# Altium PCB Modelo-2.PcbDoc
Units mm, origin at the board's own origin, x right, y up, seen from the top; angles counter-clockwise.
Board outline 72.5 x 45 mm, 2 copper layers (Top Layer, Bottom Layer); 12 components, 8 nets, 35 pads, 0 vias.
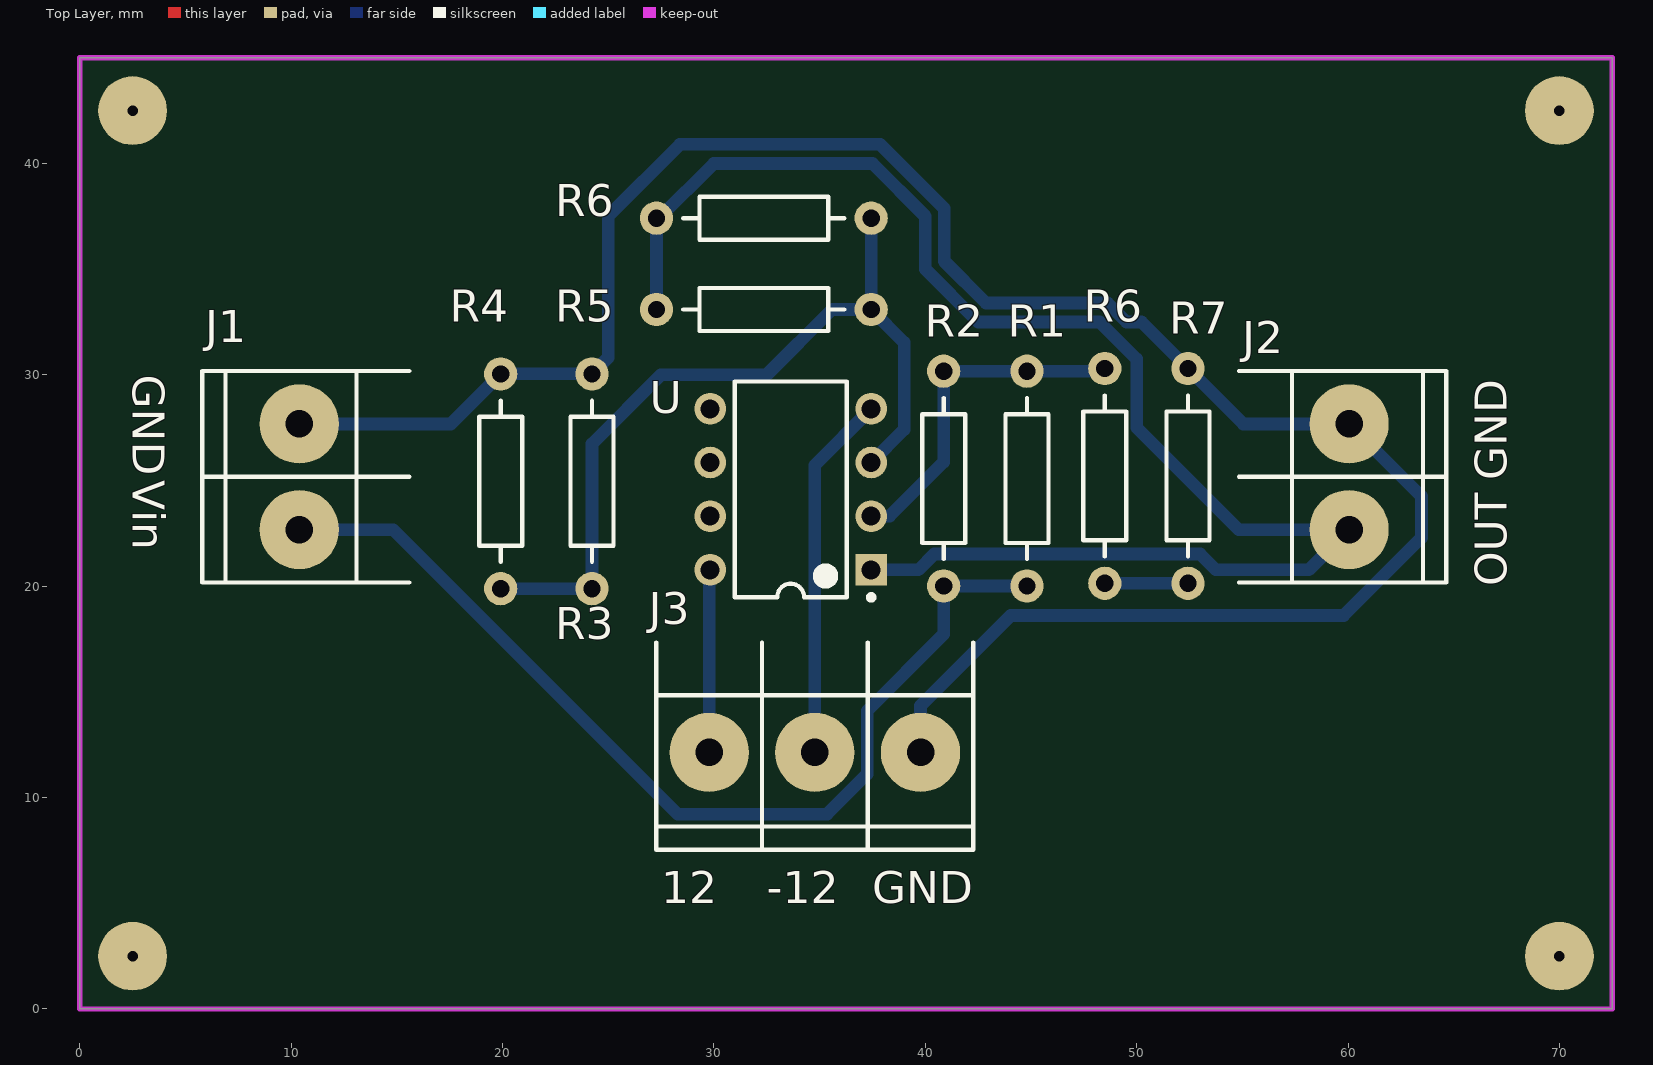
[diagram p0: Top Layer view]
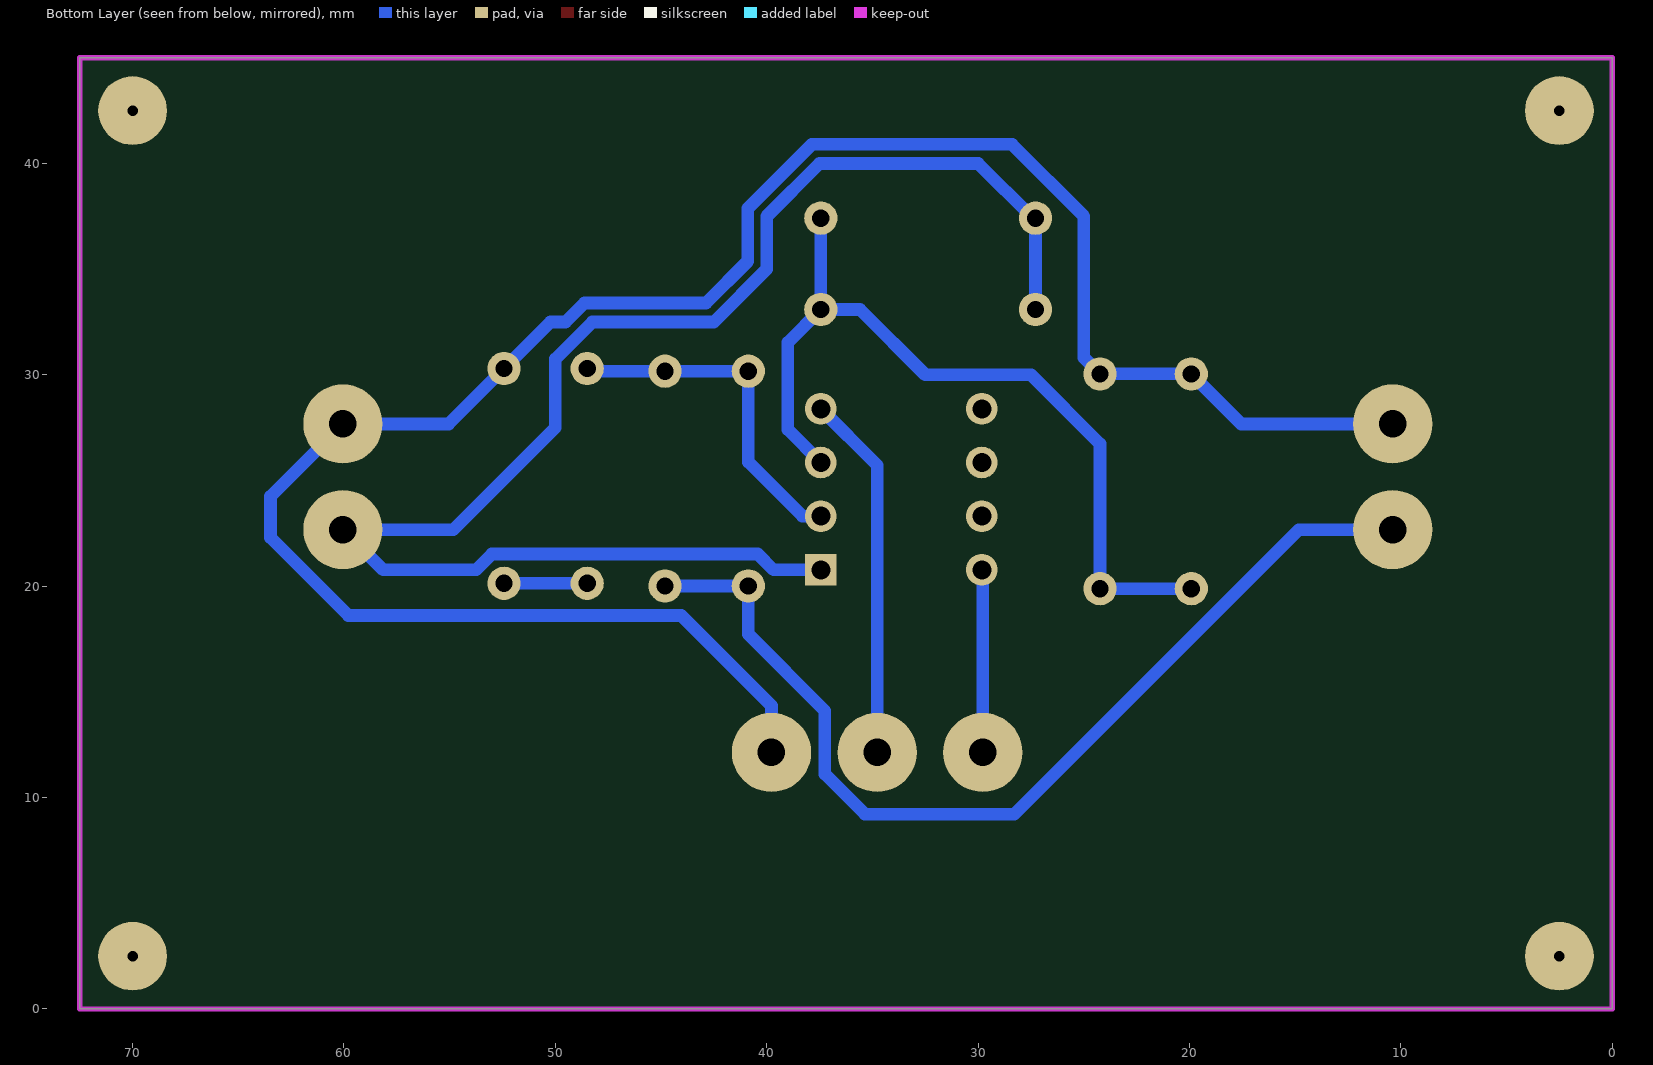
[diagram p1: Bottom Layer view, seen from below]
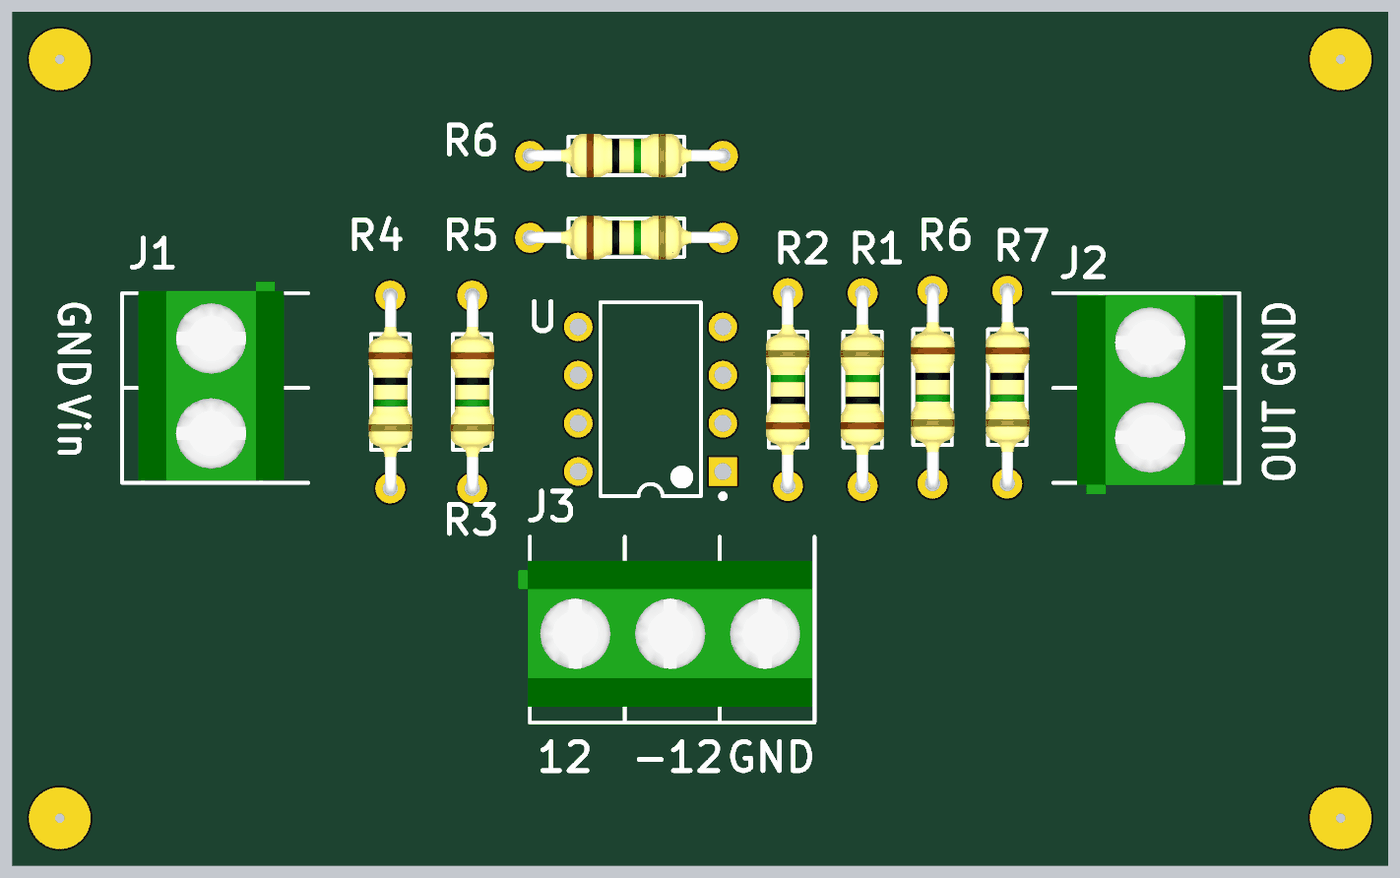
[diagram p2: 3D render of the assembled board from above, using the file's embedded part models]

## Layer stack, top to bottom
Top Solder: solder mask 0.0102, Solder Resist, Dk 3.5
Top Layer: signal copper 0.0356
Dielectric 1: dielectric 0.32, FR-4, Dk 4.8
Bottom Layer: signal copper 0.0356
Bottom Solder: solder mask 0.0102, Solder Resist, Dk 3.5

## Board outline
0,0 0,45 72.5,45 72.5,0

## Design rules (kind name [scope] priority, off if disabled: settings)
Clearance [All] p1: gap=0.3 ignorepadtopadclearanceinfootprint=FALSE
PolygonConnect [All] p1: connectstyle=Relief reliefconductorwidth=0.254 reliefentries=4 polygonreliefangle="90 Angle" airgapwidth=0.254
RoutingVias [All] p1: holewidth=0.7 width=2 viastyle="Through Hole" minholewidth=0.7 minwidth=2 maxholewidth=0.7 maxwidth=2
SolderMaskExpansion [All] p1: expansion=0.102
Width [All] p1: maxlimit=0.6 minlimit=0.6 preferedwidth=0.6
30 further rules are at their usual default settings.

## Components (designator, comment, footprint, x,y, rotation, side; value= is the part's Value field where it differs from the comment)
J1 "BORNERA 2" BORNERA2 10.391,25.177 r0 top
J2 "BORNERA 2" BORNERA2 60.048,25.177 r180 top
J3 "BORNERA 3" BORNERA3 34.775,12.136 r90 top
R1 "150K" RES400 44.808,20.01 r90 top
R2 "150K" RES400 40.871,20.01 r90 top
R3 "150K" RES400 24.234,30.043 r270 top
R4 "150K" RES400 19.916,30.043 r270 top
R5 "150K" RES400 27.282,33.091 r0 top
R6 "150K" RES400 48.491,30.297 r270 top
R6 "150K" RES400 27.282,37.409 r0 top
R7 "150K" RES400 52.428,30.297 r270 top
U "TL072CP" TI-P8 33.632,24.582 r180 top

## Footprints (in the part's own frame and the unit in brackets; to place one, negate y for a bottom-side part, rotate by r counter-clockwise, add the part's x,y. Pads: shape width x height; smd on the part's side, far side on the other; paste and mask are expansions set on the pad)
BORNERA2 [mm] "Bornera con Tornillos 5mm separación"
  round 3.75 hole 1.3: 1(0,2.5) 2(0,-2.5)
  silkscreen extent -4.6,-5 5.2,5, body extent -3.76,-4.89 3.94,5.61, height 10
BORNERA3 [mm] "Bornera con Tornillos 5mm separación"
  round 3.75 hole 1.3: 1(0,5) 2(0,0) 3(0,-5)
  silkscreen extent -4.6,-7.5 5.2,7.5, body extent -3.76,-7.39 3.94,8.11, height 10.05
RES400 [mil]
  round 62 hole 32: 1(0,0) 2(400,0)
  silkscreen extent 50,-40 350,40, body extent -12,-45 412,46, height 96
TI-P8 [mm] "DIP, 8-Leads, Body 9.59x6.35mm, Pitch 2.54mm"
  rect 1.5x1.5 hole 0.9: 1(-3.81,3.81)
  round 1.5 hole 0.9: 2(-3.81,1.27) 3(-3.81,-1.27) 4(-3.81,-3.81) 5(3.81,-3.81) 6(3.81,-1.27) 7(3.81,1.27) 8(3.81,3.81)
  silkscreen extent -3.94,-5.1 2.65,5.23, body extent -3.95,-5.07 3.95,5.07, height 5.08

## Part data
R1 R2 R3 R4 R5 R6 R6 R7: library part RES
U: "Dual Low-Noise JFET-Input General-Purpose Operational Amplifier, 7 to 36 V, 0 to 70 degC, 8-pin DIP (P8), Pb-Free (RoHS)", Manufacturer="Texas Instruments", Rating=Catalog, Supplier Part Number 1=296-1775-5-ND, Total Supply Voltage(Max)(+5V is 5, +/-5V is 10)=36, Total Supply Voltage(Min)(+5V is 5, +/-5V is 10)=7, CMRR(Min)(dB)=70, Code_JEDEC=MS-001, ComponentLink1Description="Manufacturer URL", ComponentLink1URL=http://www.ti.com/, ComponentLink2Description=Datasheet, ComponentLink2URL=http://www.ti.com/lit/ds/symlink/tl072.pdf, ComponentLink3Description="Package Specification", ComponentLink3URL=http://www.ti.com/litv/pdf/mpdi001b, DatasheetVersion=SLOS080J, Eco-Plan="Pb-Free (RoHS)", GBW(Typ)(MHz)=3, IIB(Max)(pA)=200, Iq per channel(Max)(mA)=2.5, Mounting Technology="Through Hole", Number of Channels=2, Offset Drift(Typ)(uV/C)=18, PackageDescription="8-Pin Plastic In-Line, Body 9.59 x 6.35 mm, Pitch 2.54 mm", PackageReference=P8, PackageVersion="4040082/E, 04/2010", PartNumber=TL072CP, Slew Rate(Typ)(V/us)=13, Sub Family="General Purpose Amplifier, High Supply Voltage Amplifier (>=30V)", Supplier 1=Digi-Key, Supplier 2=Farnell, Supplier 3=Newark, Supplier 4=Mouser, Supplier Part Number 2=1106015, Supplier Part Number 3=60K6988, Supplier Part Number 4=595-TL072CP, Vio (25C)(Max)(mV)=10, Vn at 1kHz(Typ)(nV/rtHz)=18

## Free pads (board coordinates)
  round 3.25 hole 0.5: 2(2.5,42.5) 3(70,42.5) 4(70,2.5) 5(2.5,2.5)

## Nets (pads, with @x,y where several pads share a name; then routed paths per layer and width w, separated by ;. In a path a pad name is that pad's centre, name@x,y a point inside that pad or via, vN(x,y) a via of type N, cw(c..) or ccw(c..) an arc to the next point about the centre after c; other vN are vias at no path point)
-VCC: J3.2 U.4 | length 17.4
  Bottom Layer w0.6: J3.2 34.775,25.725 U.4
GND: J1.1 J2.2 J3.3 R3.1 R4.1 R7.1 | length 102
  Bottom Layer w0.6: J1.1 17.55,27.677 R4.1 R3.1 25,30.809 25,37.5 28.4,40.9 37.873,40.9 40.9,37.873 40.9,35.373 42.873,33.4 48.623,33.4 49.523,32.5 50.225,32.5 R7.1 55.048,27.677 J2.2 63.477,24.248 63.477,22.296 59.794,18.613 44.046,18.613 39.775,14.342 J3.3
NetJ1_2: J1.2 R1.1 R2.1 | length 47.6
  Bottom Layer w0.6: J1.2 14.823,22.677 28.285,9.215 35.354,9.215 37.25,11.111 37.25,14.103 40.871,17.724 R2.1 R1.1
NetJ2_1: J2.1 R5.1 R6.1@27.282,37.409 U.1 | length 72.7
  Bottom Layer w0.6: R5.1 27.282,37.409 27.409,37.409 30,40 37.5,40 40,37.5 40,35 42.5,32.5 48.25,32.5 50,30.75 50,27.5 54.823,22.677 J2.1 58.143,20.772 53.755,20.772 53.003,21.524 40.423,21.524 39.671,20.772 U.1
NetR1_2: R1.2 R2.2 R6.1@48.491,30.297 U.2 | length 16.5
  Bottom Layer w0.6: U.2 38.312,23.312 40.871,25.871 R2.2 R1.2 48.364,30.17 R6.1@48.491,30.297
NetR3_2: R3.2 R4.2 R5.2 R6.2@37.442,37.409 U.3 | length 39.9
  Bottom Layer w0.6: R4.2 R3.2 24.234,26.734 27.5,30 32.5,30 35.591,33.091 R5.2 ; U.3 39,27.41 39,31.533 R5.2 ; R6.2@37.442,37.409 R5.2
NetR6_2: R6.2@48.491,20.137 R7.2 | length 3.9
  Bottom Layer w0.6: R6.2@48.491,20.137 R7.2
VCC: J3.1 U.8 | length 8.7
  Bottom Layer w0.6: J3.1 29.775,20.725 U.8
pads on no net: U.5 U.6 U.7

## Keep-outs
Keep-Out Layer:
  the board outline again, w0.254

## Silkscreen, mask and mechanical layers (free items; w line width, h text height)
Top Overlay:
  text "GND" at 2.5,30 h1.52 r270
  text "Vin" at 2.5,25 h1.52 r270
  text "GND" at 67.5,25 h1.52 r90
  text "OUT" at 67.5,20 h1.52 r90
  text "12" at 27.5,5 h1.52
  text "-12" at 32.5,5 h1.52
  text "GND" at 37.5,5 h1.52